# EAGLE board rescue_linea3photo (EAGLE 9.1.3)
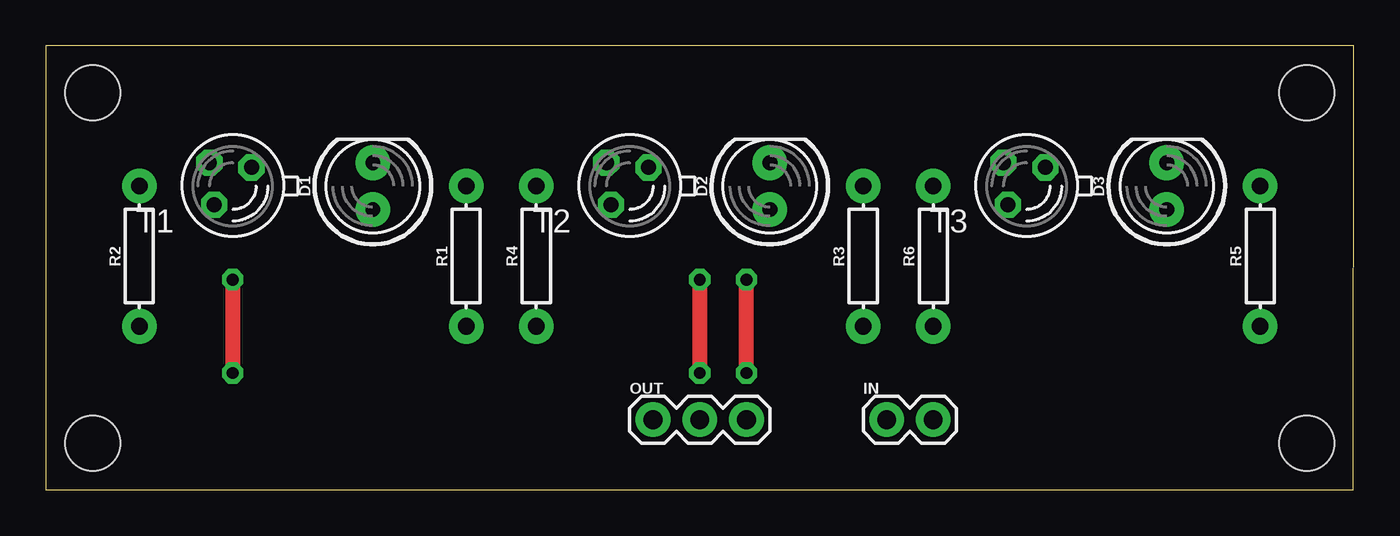
[diagram p0: board, top side]
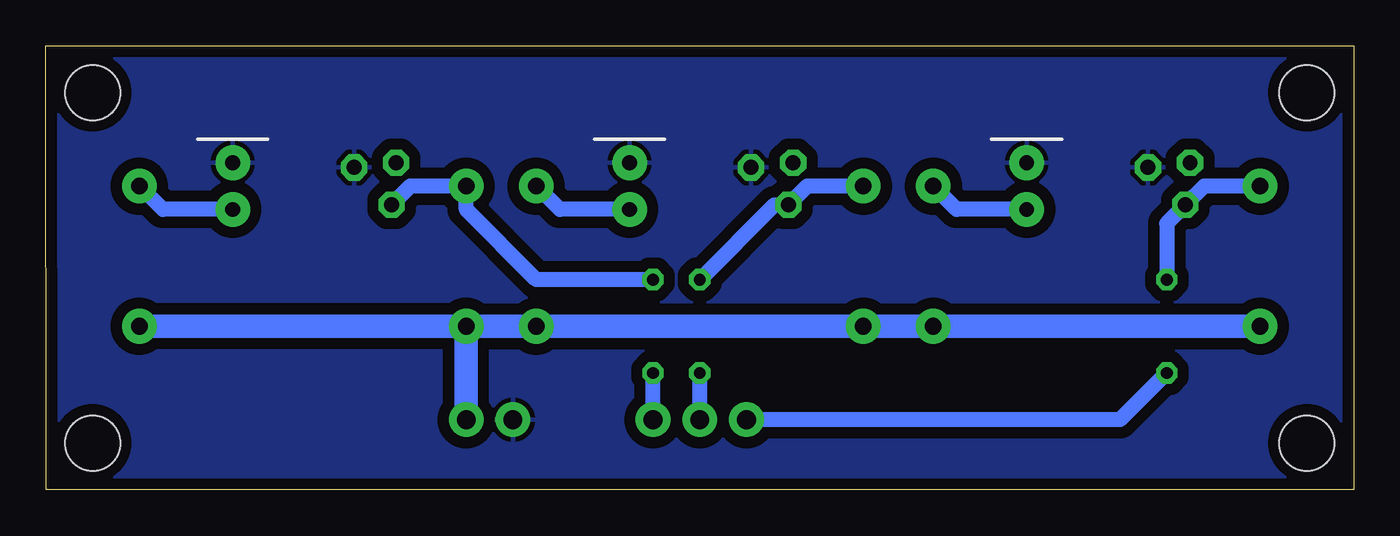
[diagram p1: board, bottom side, seen from below]

Size 71.12 x 24.13 mm. Coordinates in mm from the lower left corner, seen from the top.
Outline: 0,0 71.1,0 71.12,24.13 0,24.13 0,0
Copper layers (1*16): Top 0.035mm / dielectric 1.5mm / Bottom 0.035mm
Design rules "SparkFun": minimum track width 8mil, minimum drill 20mil, track to track 8mil, track to pad 8mil, pad to pad 8mil, via to via 8mil, smd to smd 8mil, copper to edge 10mil, drill to drill 8mil, minimum pad ring 12mil, minimum via ring 10mil, stop-mask expansion 4mil, vias tented up to drill 25mil, thermal gap 10mil
Holes 3 mm at 2.54,21.59 2.54,2.54 68.58,2.54 68.58,21.59

## Footprints (pad centres in the part's own frame; a part is rotated, then mirrored left to right if it is on the bottom)
LED_5MM = drill 0.813 pad 1.88: A -1.27,0; K 1.27,0
1X02 = drill 1.016 pad 1.88: 1 0,0; 2 2.54,0
1X03 = drill 1.016 pad 1.88: 1 0,0; 2 2.54,0; 3 5.08,0
AXIAL-0.3 = drill 0.9 pad 1.88: P$1 -3.81,0; P$2 3.81,0
BP103 = drill 0.813 octagon: B 1.27,-1.27; C 1.016,1.016; E -1.016,-1.016

## Placement (x,y rotation side)
D1  [LED_5MM]  17.78,16.51 90 top
D2  [LED_5MM]  39.37,16.51 90 top
D3  [LED_5MM]  60.96,16.51 90 top
IN  [1X02]  45.72,3.81 0 top
OUT  455-1750-1-ND  [1X03]  33.02,3.81 0 top
R1  220  [AXIAL-0.3]  22.86,12.7 90 top
R2  10k  [AXIAL-0.3]  5.08,12.7 90 top
R3  220  [AXIAL-0.3]  44.45,12.7 90 top
R4  10k  [AXIAL-0.3]  26.67,12.7 90 top
R5  220  [AXIAL-0.3]  66.04,12.7 90 top
R6  10k  [AXIAL-0.3]  48.26,12.7 90 top
T1  BP103  [BP103]  10.16,16.51 180 top
T2  BP103  [BP103]  31.75,16.51 180 top
T3  BP103  [BP103]  53.34,16.51 180 top

## Library data of the parts
D1-D3 = SparkFun-LED
IN = SparkFun-Connectors
OUT = SparkFun-Connectors; PROD_ID: XXX-00000
R1-R6 = SparkFun-Resistors
T1-T3 = opto-trans-siemens; OC_FARNELL: unknown; OC_NEWARK: unknown

## Nets
GND: D1.K D2.K D3.K IN.1 T1.E T2.E T3.E
N$1: D2.A R3.P$2
N$2: D3.A R5.P$2
N$4: D1.A R1.P$2
OUT1: OUT.1 R2.P$2 T1.C
OUT2: OUT.2 R4.P$2 T2.C
OUT3: OUT.3 R6.P$2 T3.C
VCC: IN.2 R1.P$1 R2.P$1 R3.P$1 R4.P$1 R5.P$1 R6.P$1

## Tracks (layer width: path | path; a pad name or v marks a point on that pad's centre or on a via)
GND
  pour Bottom (isolate 0.61): -1.27,25.4 72.39,25.4 72.39,-1.27 -1.27,-1.27
N$1
  Bottom 0.813: D2.A 43.18,15.24 R3.P$2
N$2
  Bottom 0.813: D3.A 64.77,15.24 R5.P$2
N$4
  Bottom 0.813: D1.A 21.59,15.24 R1.P$2
OUT1  (via drill 0.65)
  Top 0.813: v10.16,11.43 v10.16,6.35
  Bottom 0.813: R2.P$2 8.13,16.51 T1.C 10.16,14.48 v10.16,11.43 | v10.16,6.35 12.7,3.81 OUT.1
OUT2  (via drill 0.65)
  Top 0.813: v35.56,6.35 v35.56,11.43
  Bottom 0.813: R4.P$2 29.72,16.51 T2.C 31.5,15.49 v35.56,11.43 | OUT.2 v35.56,6.35
OUT3  (via drill 0.65)
  Top 0.813: v38.1,6.35 v38.1,11.43
  Bottom 0.813: T3.C 51.31,16.51 R6.P$2 48.26,15.24 44.45,11.43 v38.1,11.43 | OUT.3 v38.1,6.35
VCC
  Bottom 1.27: IN.2 R6.P$1 | R6.P$1 R5.P$1 | R6.P$1 R3.P$1 R4.P$1 R1.P$1 R2.P$1